# Altium PCB PES_BOARD_V2023.PcbDoc (part 1 of 3)
Units mm, origin at the board's own origin, x right, y up, seen from the top; angles counter-clockwise.
Board outline 110.62 x 70.82 mm, 2 copper layers (Top Layer, Bottom Layer), stack 0.325 mm thick; 197 components, 152 nets, 714 pads, 351 vias.
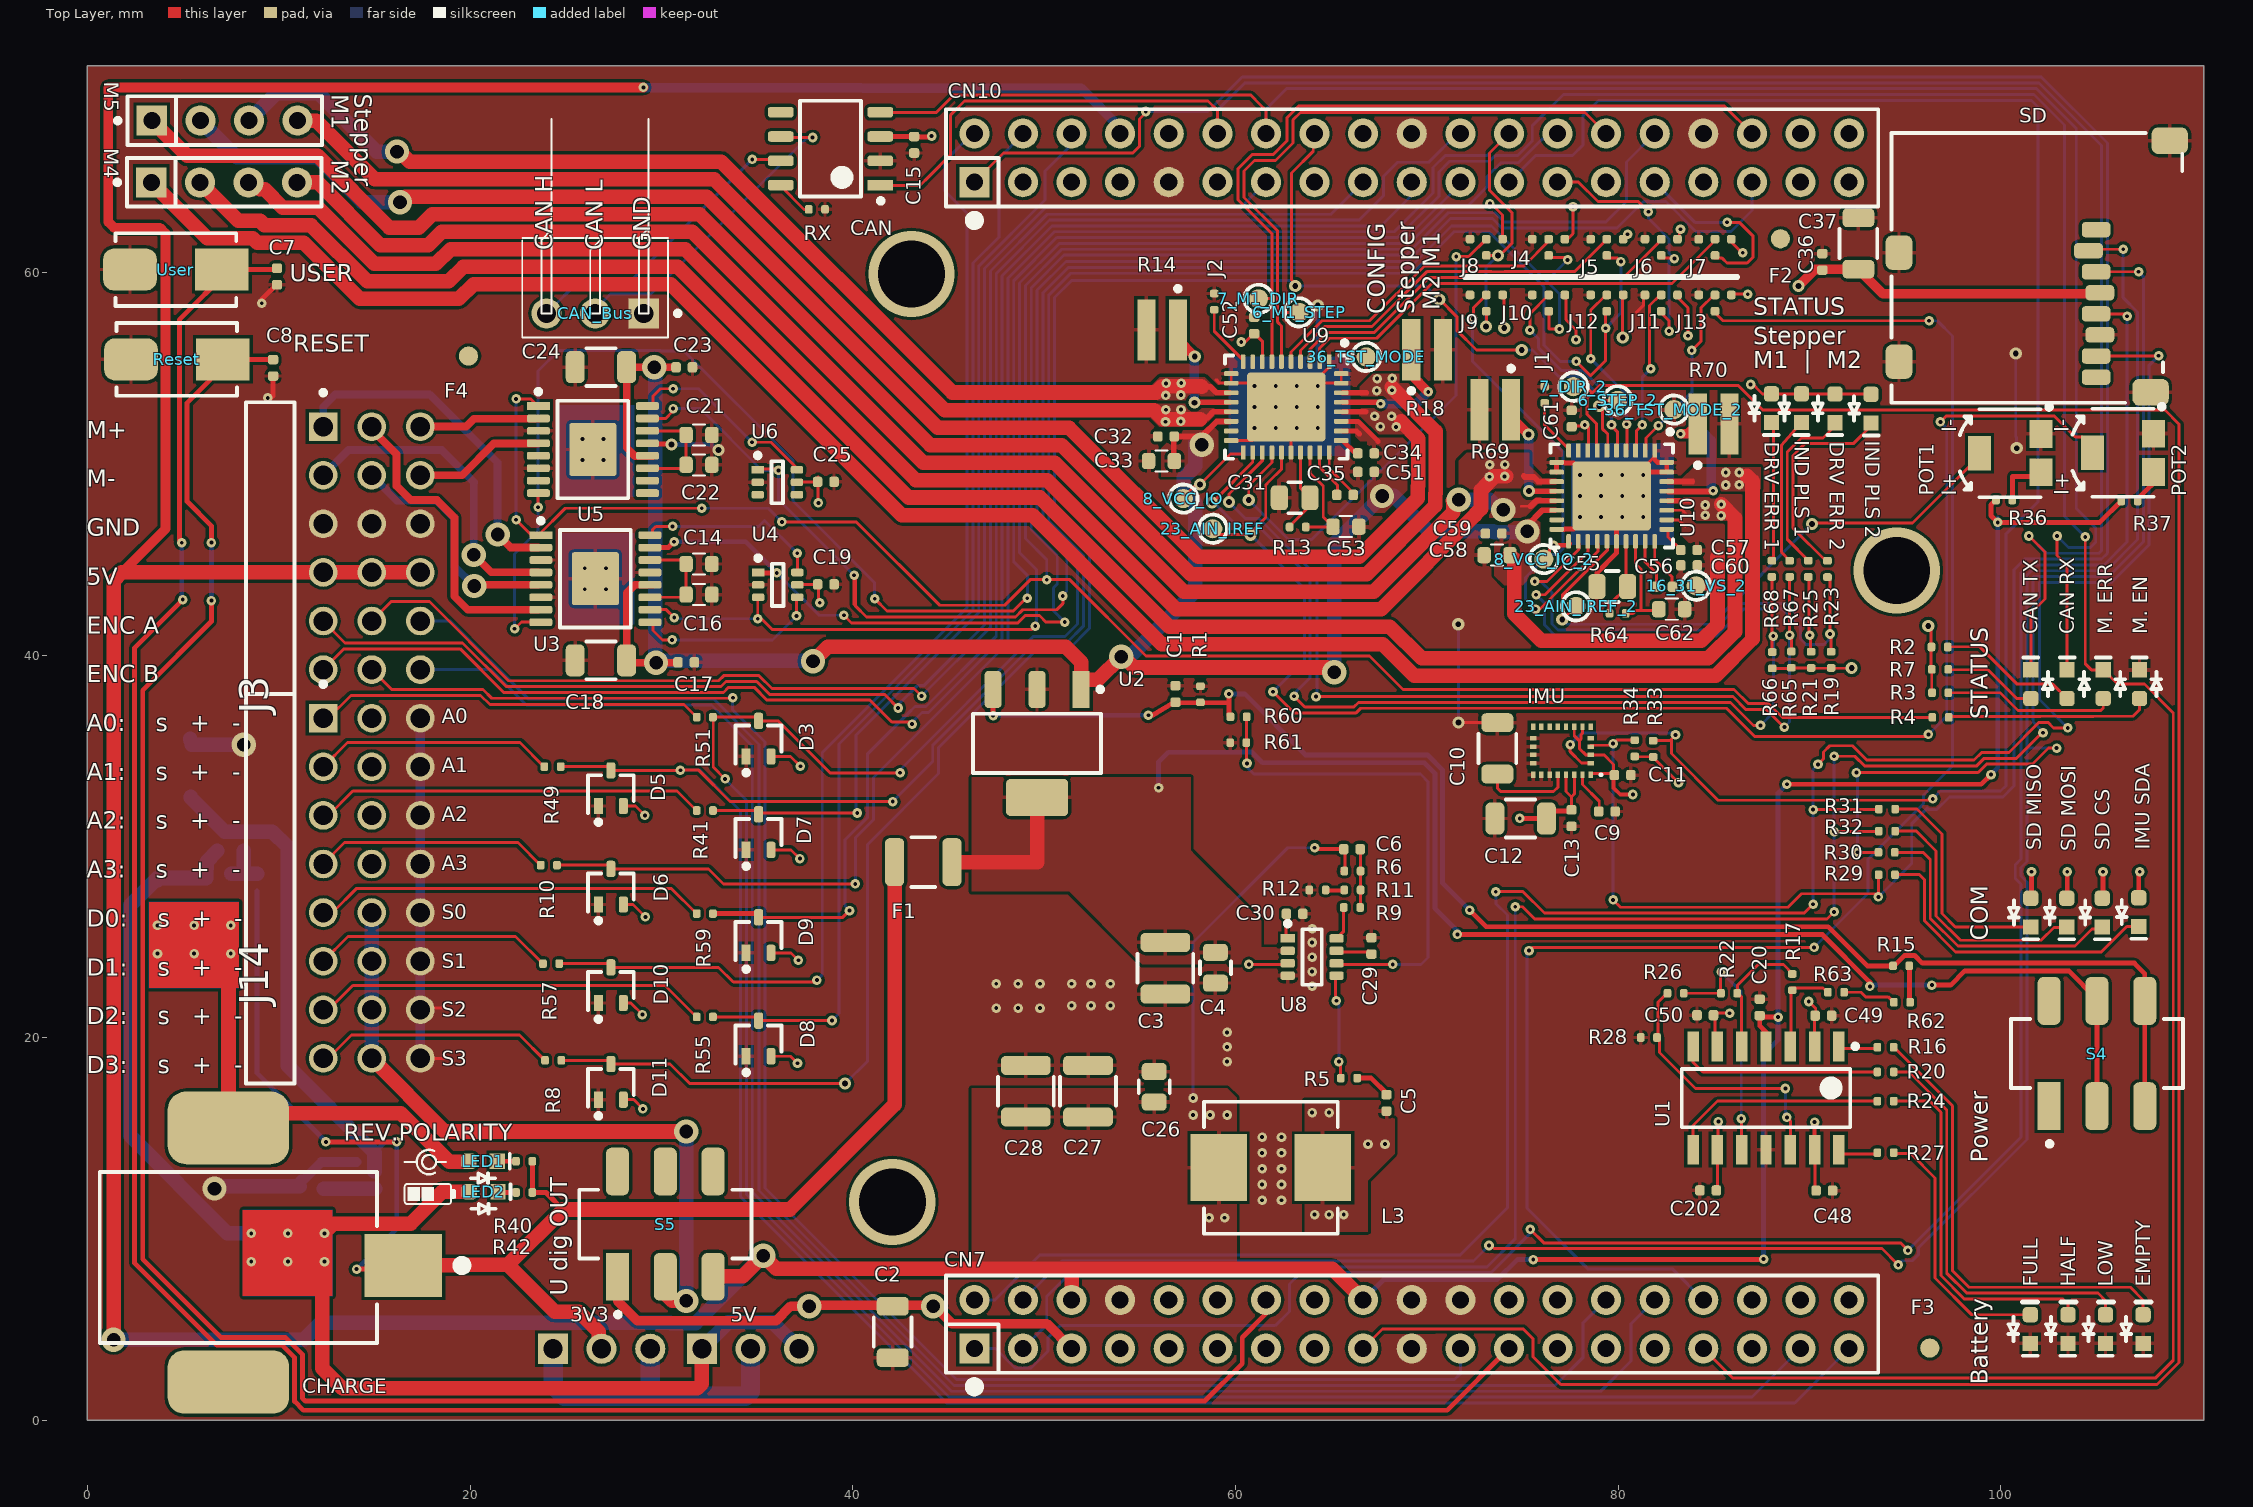
[diagram p0: Top Layer view]
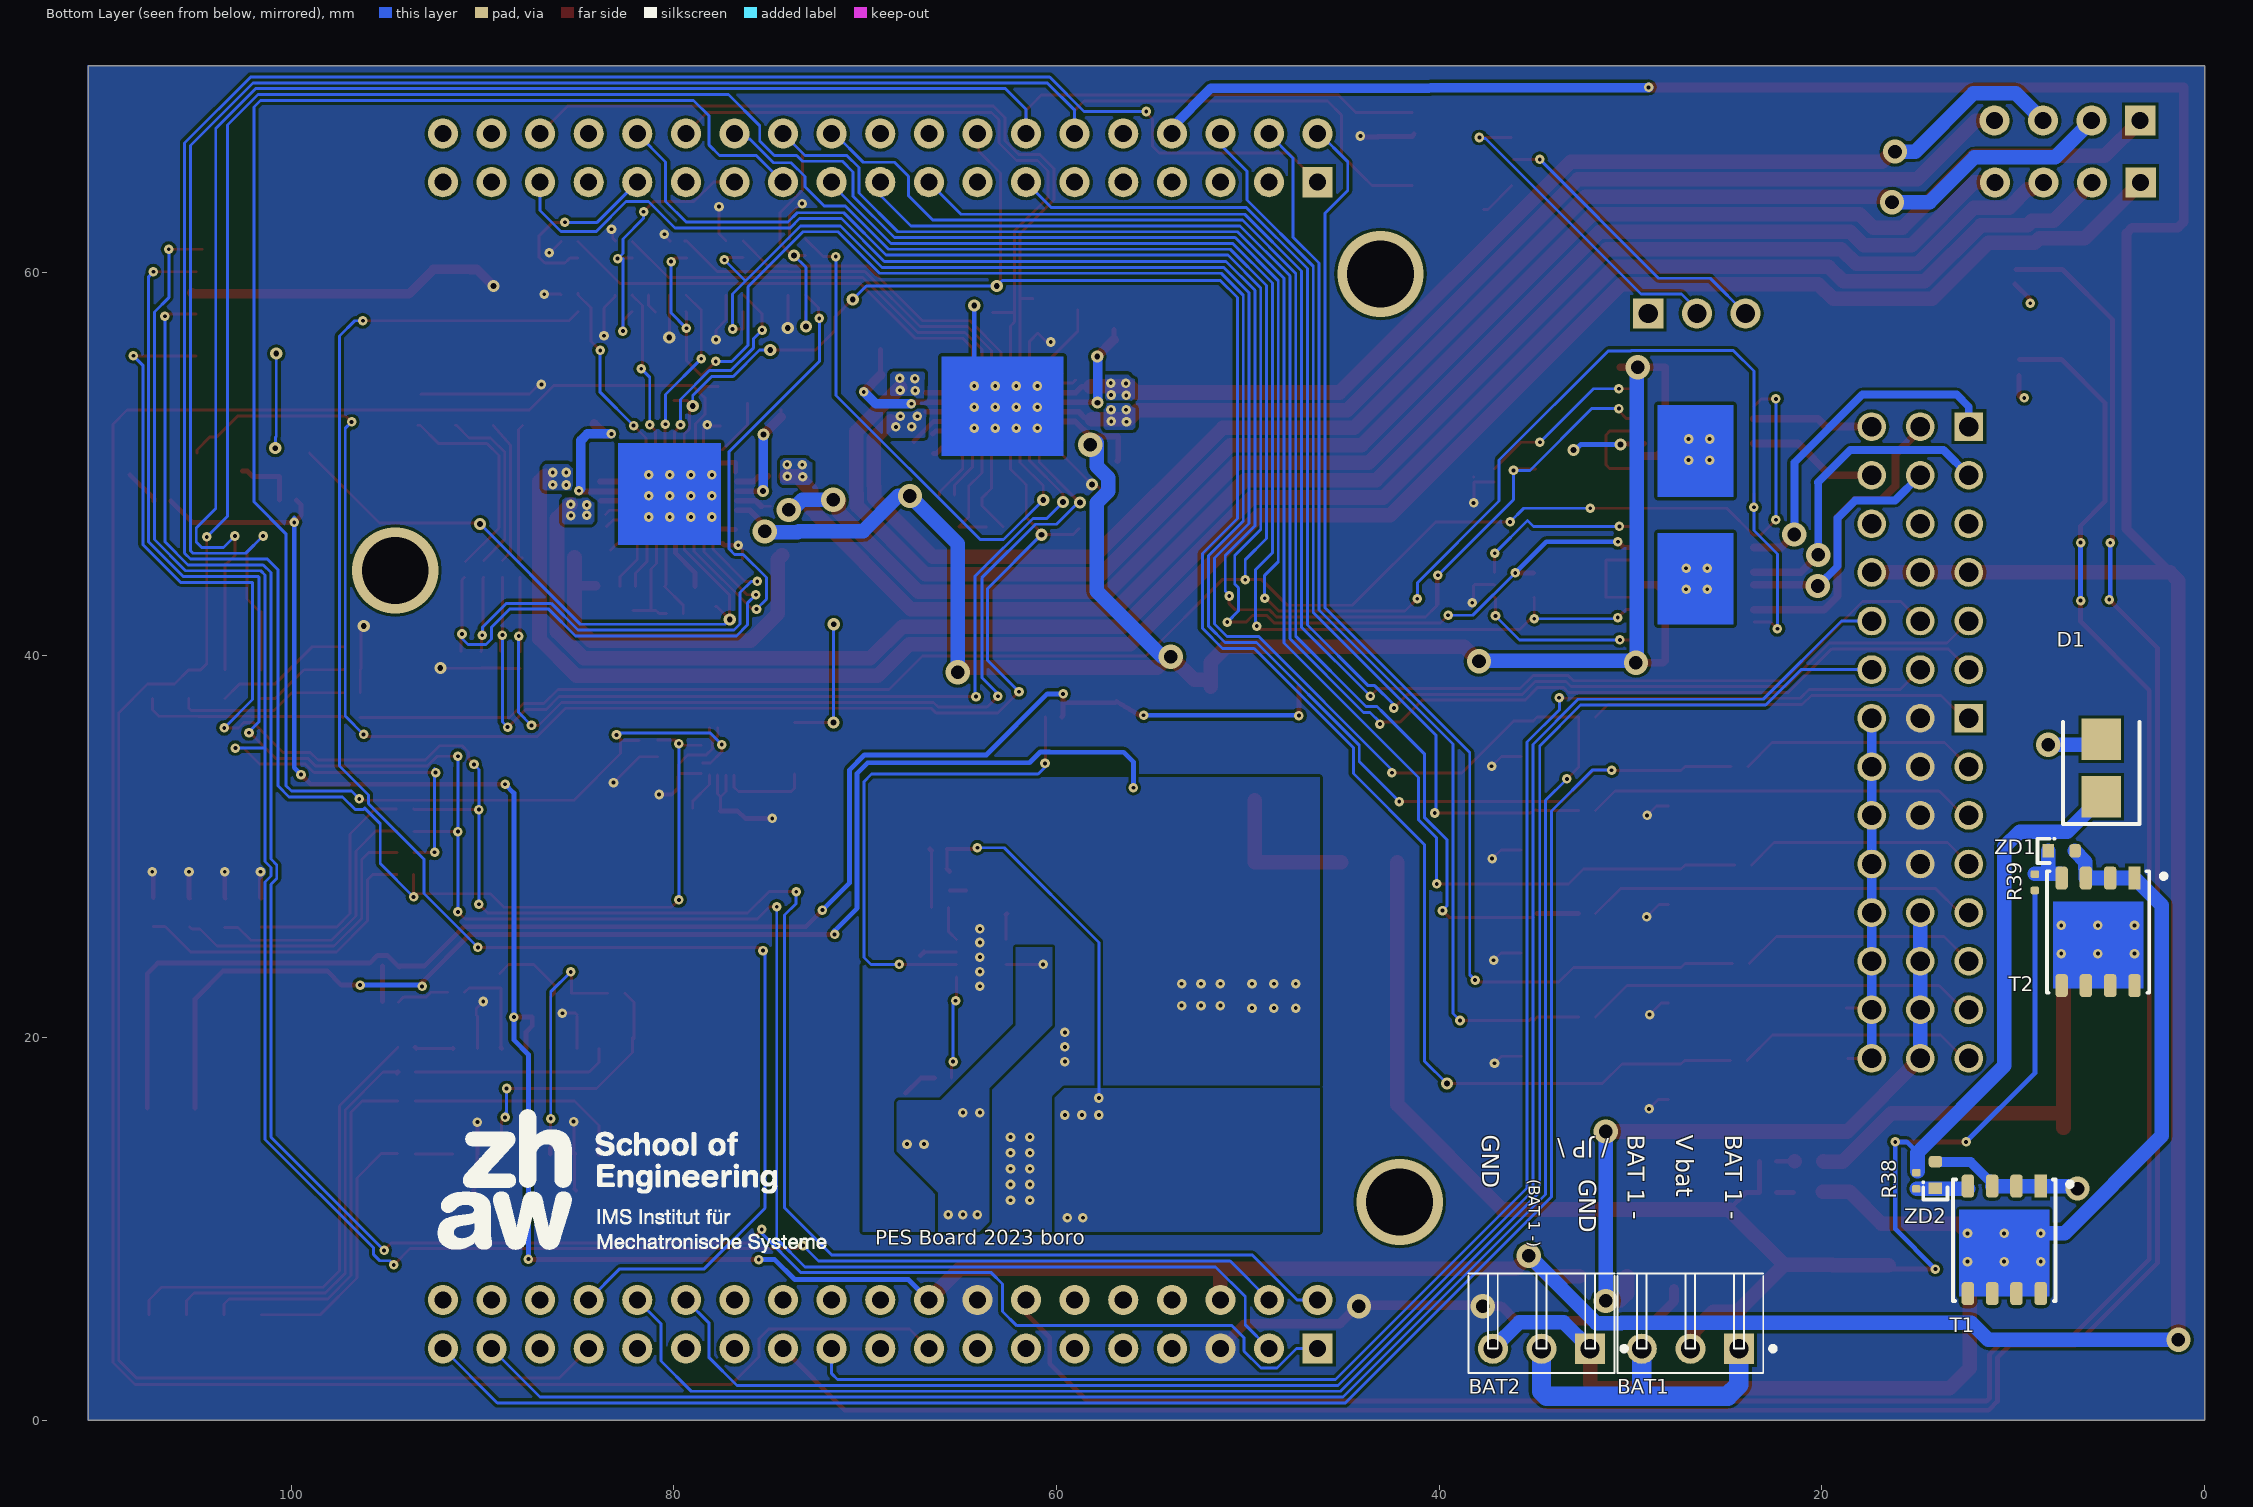
[diagram p1: Bottom Layer view, seen from below]
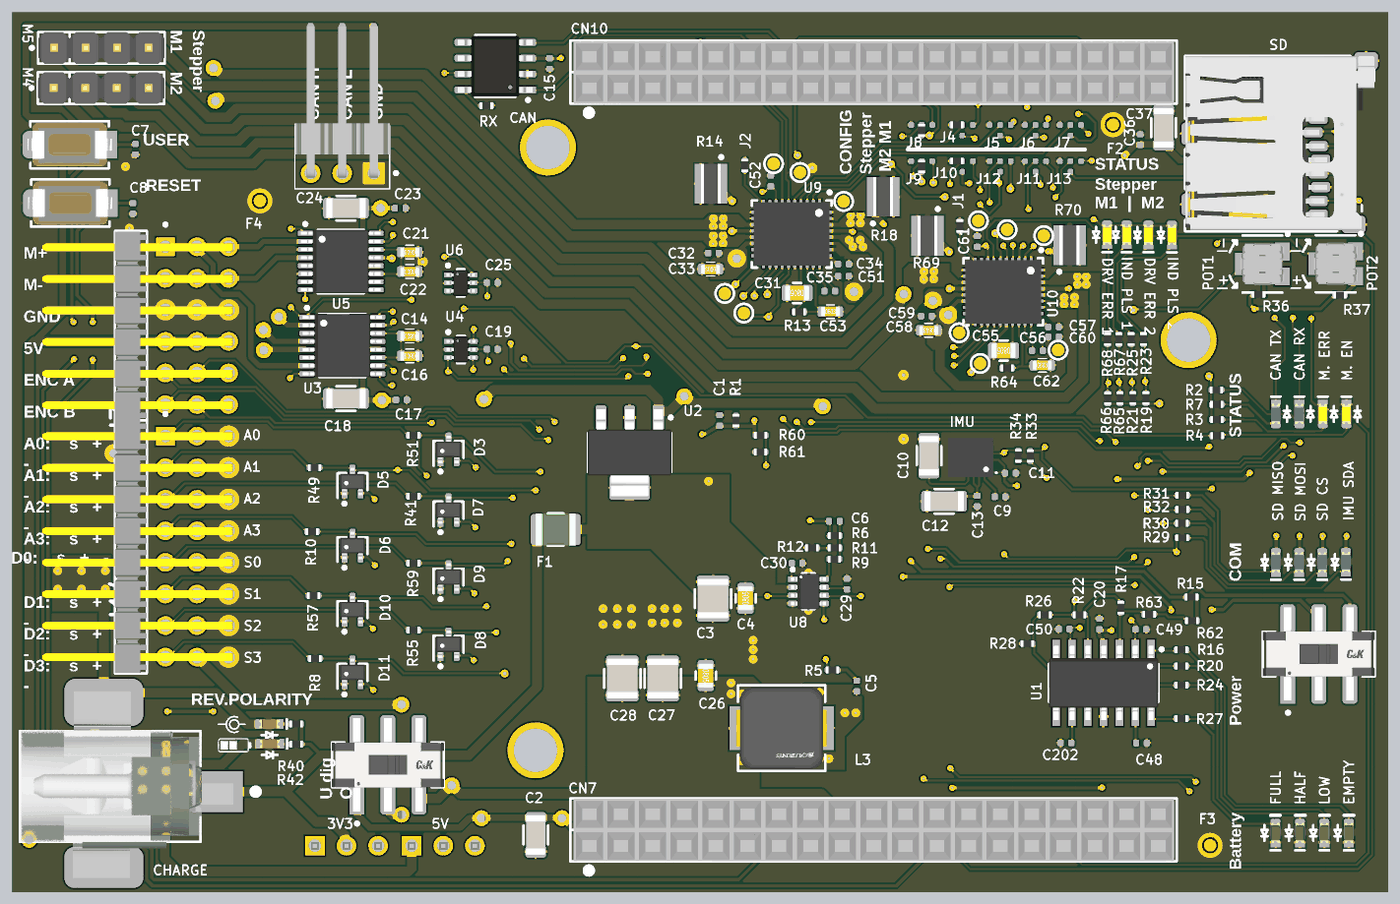
[diagram p4: 3D render of the assembled board from above, using the file's embedded part models]
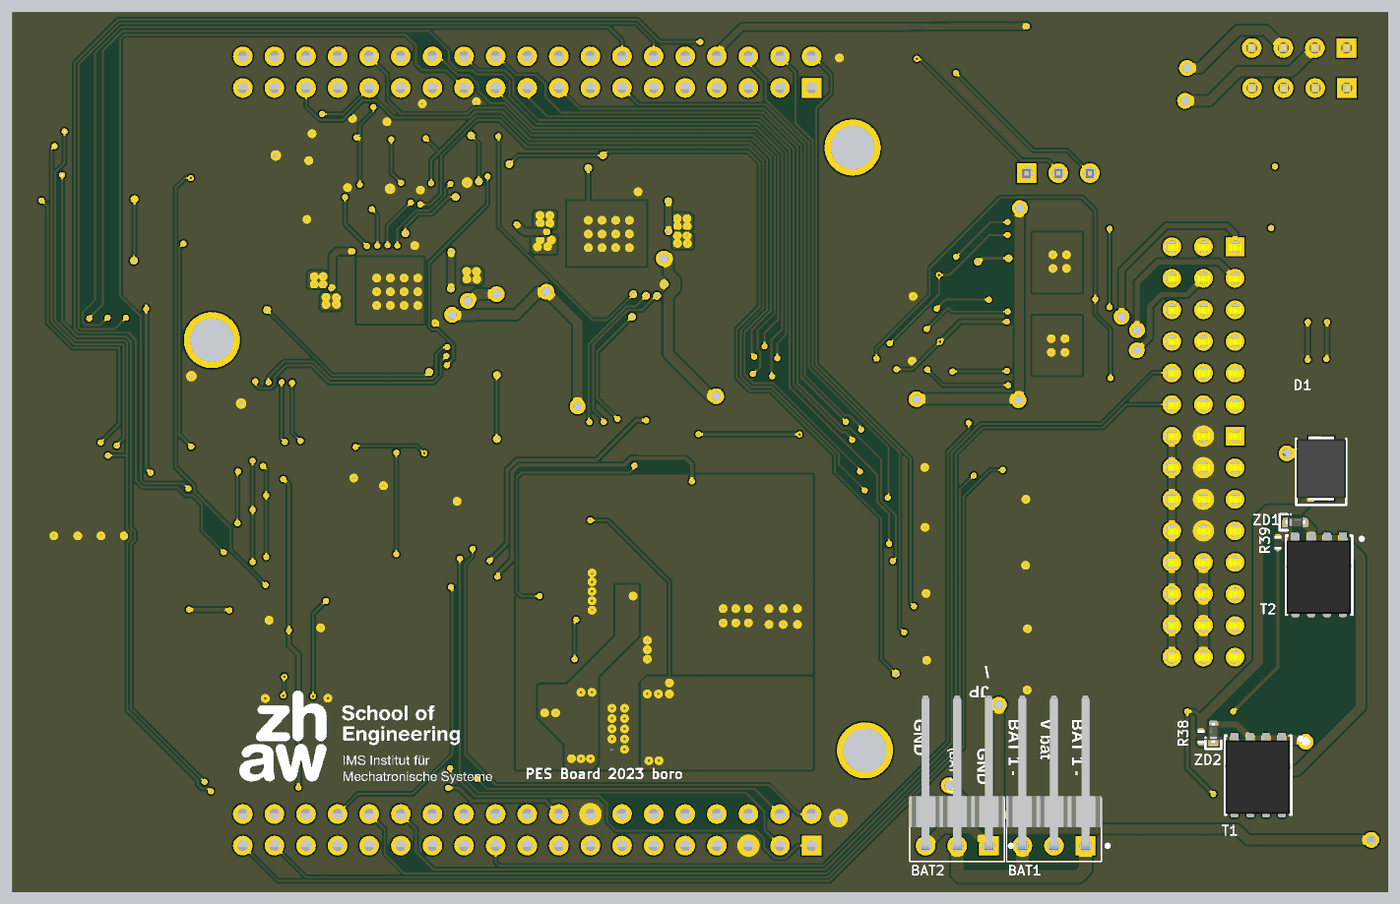
[diagram p5: 3D render of the assembled board from below, using the file's embedded part models]

## Layer stack, top to bottom
Top Solder: solder mask 0.0102, Solder Resist, Dk 3.5
Top Layer: signal copper 0.0356
Dielectric 1: core 0.254, FR-4, Dk 4.2
Bottom Layer: signal copper 0.0356
Bottom Solder: solder mask 0.0102, Solder Resist, Dk 3.5

## Board outline
0,0 110.617,0 110.617,70.815 0,70.815

## Design rules (kind name [scope] priority, off if disabled: settings)
Clearance [All] p1: gap=0.152 ignorepadtopadclearanceinfootprint=FALSE except(0: Arc-Hole Track-Hole SMDPad-Hole THPad-Hole Via-Hole Fill-Hole Poly-Hole Region-Hole Text-Hole)
ComponentClearance [All] p1 off: gap=0.254 collisioncheckmode=3 verticalgap=0.254 showdistances=FALSE
Height [All] p1 off: minheight=0 maxheight=25.4 prefheight=12.7
PlaneConnect [All] p1: planeconnectstyle=Direct reliefexpansion=0.508 reliefentries=4 reliefconductorwidth=0.254 reliefairgap=0.254
PolygonConnect [All] p1: thpad.connectstyle=Direct thpad.reliefconductorwidth=0.254 thpad.reliefentries=4 thpad.polygonreliefangle="90 Angle" thpad.airgapwidth=0.254 smdpad.connectstyle=Relief smdpad.reliefconductorwidth=0.203 smdpad.reliefentries=4 smdpad.polygonreliefangle="90 Angle" smdpad.airgapwidth=0.152 via.connectstyle=Direct via.reliefconductorwidth=0.254 via.reliefentries=4 via.polygonreliefangle="90 Angle" via.airgapwidth=0.254
RoutingVias [All] p1: holewidth=0.305 width=0.635 viastyle="Through Hole" minholewidth=0.305 minwidth=0.635 maxholewidth=564.439 maxwidth=141.097
SilkToSolderMaskClearance [IsPad] p1: minsilkscreentomaskgap=0.127 clearancetoexposedcopper=TRUE
SolderMaskExpansion [All] p1: expansion=0.102 istentingtop=FALSE
Width [All] p1: maxlimit=5.08 minlimit=0.152 preferedwidth=0.254
26 further rules are at their usual default settings.

## Classes and differential pairs
component class Memory: C36 C37 R30 R31 R32 SD "SD CS" "SD MISO" "SD MOSI"
component class StepperMotorDriver: 6_M1_STEP 6_STEP_2 7_DIR_2 7_M1_DIR 8_VCC_IO 8_VCC_IO_2 16_31_VS_2 23_AIN_IREF 23_AIN_IREF_2 36_TST_MODE 36_TST_MODE_2 C31 C32 C33 C34 C35 C51 C52 C53 C55 C56 C57 C58 C59 C60 C61 C62 Driver_error_2 "DRV ERR 1" "DRV ERR 2" drv_err Drv_err "IND PLS 1" "IND PLS 2" Ind_pls Index_pulse_2 J1 J2 J4 J5 J6 J7 J8 J9 J10 J11 J12 J13 M4 M5 POT1 POT2 R13 R14 R18 R19 R21 R23 R25 R36 R37 R64 R65 R66 R67 R68 R69 R70 U9 U10
component class AuxConnectors: CAN_Bus D3 D5 D6 D7 D8 D9 D10 D11 J14 R8 R10 R41 R49 R51 R55 R57 R59 S5
component class PES_BOARD_V2023: F2 F3 F4
component class Power: BAT1 BAT2 C1 C2 C3 C4 C5 C6 C26 C27 C28 C29 C30 CHARGE Chargerev_polarity D1 F1 L3 L? LED1 LED2 R1 R5 R6 R9 R11 R12 R38 R39 R40 R42 R60 R61 S4 T1 T2 U2 U8 ZD1 ZD2
component class UC: * *2 *3 *5 C7 C8 CN7 CN10 Reset User
component class Motordriver: C14 C16 C17 C18 C19 C21 C22 C23 C24 C25 J3 "M. EN" "M. ERR" M.ERr R3 R4 U3 U4 U5 U6
component class Communication: C15 CAN "CAN RX" "CAN TX" R2 R7 RX
component class DigitalSensors: C9 C10 C11 C12 C13 IMU "IMU CS_AG" "IMU CS_M" "IMU SDA" R29 R33 R34
component class Indicators: 30 C20 C48 C49 C50 C202 EMPTY FUEL FULL HALF LOW R15 R16 R17 R20 R22 R24 R26 R27 R28 R62 R63 U1

## Components (designator, comment, footprint, x,y, rotation, side; value= is the part's Value field where it differs from the comment)
6_M1_STEP "Test Pad" TP10R 63.325,57.915 r90 top
6_STEP_2 "Test Pad" TP10R 79.975,53.315 r90 top
7_DIR_2 "Test Pad" TP10R 77.665,54.03 r90 top
7_M1_DIR "Test Pad" TP10R 61.205,58.622 r90 top
8_VCC_IO "Test Pad" TP10R 57.279,48.185 r90 top
8_VCC_IO_2 "Test Pad" TP10R 76.12,45.02 r90 top
16_31_VS_2 "Test Pad" TP10R 84.075,43.625 r90 top
23_AIN_IREF "Test Pad" TP10R 58.816,46.605 r90 top
23_AIN_IREF_2 "Test Pad" TP10R 77.805,42.551 r90 top
36_TST_MODE "Test Pad" TP10R 66.835,55.585 r90 top
36_TST_MODE_2 "Test Pad" TP10R 82.919,52.835 r90 top
BAT1 "PRPC003SGAN-M71RC" HD254_1x3_MH 24.335,3.749 r90 bottom
BAT2 "PRPC003SGAN-M71RC" HD254_1x3_MH 32.115,3.749 r90 bottom
C1 "100nF/50V" CAPC1005X05L 56.865,37.971 r270 top value=100nF
C2 "10uF/50V" CAPC3216X12L 42.088,4.623 r90 top value=10µF
C3 "47uF/16V" CAPC3225X25L 56.337,23.635 r90 top value=47µF
C4 "4.7uF/50V" CAPC2012X15L 58.953,23.66 r90 top value=4.7µF
C5 "100nF/50V" CAPC1005X05L 67.894,16.599 r90 top value=100nF
C6 "15pF/50V" CAPC1005X05L 66.091,29.858 r180 top value=15pF
C7 "100nF/50V" CAPC1005X05L 9.906,59.792 r90 top value=100nF
C8 "100nF/50V" CAPC1005X05L 9.703,55.016 r90 top value=100nF
C9 "100nF/50V" CAPC1005X05L 79.416,31.829 r0 top value=100nF
C10 "10uF/50V" CAPC3216X12L 73.691,35.129 r270 top value=10µF
C11 "100nF/50V" CAPC1005X05L 80.239,33.731 r0 top value=100nF
C12 "10uF/50V" CAPC3216X12L 74.909,31.463 r0 top value=10µF
C13 "100nF/50V" CAPC1005X05L 77.566,31.479 r270 top value=100nF
C14 "1uF/50V" CAPC1608X09L 31.962,44.764 r180 top value=1µF
C15 "100nF/50V" CAPC1005X05L 43.205,66.675 r90 top value=100nF
C16 "1uF/50V" CAPC1608X09L 31.962,43.163 r180 top value=1µF
C17 "100nF/50V" CAPC1005X05L 31.293,39.624 r180 top value=100nF
C18 "10uF/50V" CAPC3216X12L 26.831,39.726 r180 top value=10µF
C19 "100nF/50V" CAPC1005X05L 38.591,43.697 r0 top value=100nF
C20 "100nF/50V" CAPC1005X05L 87.401,21.59 r90 top value=100nF
C21 "1uF/50V" CAPC1608X09L 31.962,51.511 r180 top value=1µF
C22 "1uF/50V" CAPC1608X09L 31.962,49.945 r180 top value=1µF
C23 "100nF/50V" CAPC1005X05L 31.191,55.042 r180 top value=100nF
C24 "10uF/50V" CAPC3216X12L 26.831,55.051 r180 top value=10µF
C25 "100nF/50V" CAPC1005X05L 38.591,49.056 r0 top value=100nF
C26 "4.7uF/50V" CAPC2012X15L 55.753,17.437 r270 top value=4.7µF
C27 "47uF/16V" CAPC3225X25L 52.299,17.208 r270 top value=47µF
C28 "47uF/16V" CAPC3225X25L 49.047,17.208 r270 top value=47µF
C29 "100nF/50V" CAPC1005X05L 67.107,24.803 r270 top value=100nF
C30 "22nF/50V" CAPC1005X05L 63.094,26.479 r180 top value=22nF
C31 "4.7uF/50V" CAPC2012X15L 63.095,48.225 r180 top value=4.7µF
C32 "100nF/50V" CAPC1005X05L 56.375,51.431 r180 top value=100nF
C33 "1uF/50V" CAPC1608X09L 56.135,50.145 r180 top value=1µF
C34 "100nF/50V" CAPC1005X05L 66.825,50.545 r0 top value=100nF
C35 "22nF/50V" CAPC1005X05L 65.725,48.375 r180 top value=22nF
C36 "100nF/50V" CAPC1005X05L 90.675,60.555 r90 top value=100nF
C37 "10uF/50V" CAPC3216X12L 92.561,61.515 r90 top value=10µF
C48 "100nF/50V" CAPC1005X05L 90.78,12.014 r0 top value=100nF
C49 "100nF/50V" CAPC1005X05L 90.729,21.158 r0 top value=100nF
C50 "100nF/50V" CAPC1005X05L 84.557,21.184 r180 top value=100nF
C51 "100nF/50V" CAPC1005X05L 66.825,49.577 r180 top value=100nF
C52 "100nF/50V" CAPC1005X05L 60.98,57.235 r90 top value=100nF
C53 "1uF/50V" CAPC1608X09L 65.775,46.715 r0 top value=1µF
C55 "4.7uF/50V" CAPC2012X15L 79.695,43.585 r180 top value=4.7µF
C56 "22nF/50V" CAPC1005X05L 82.415,43.579 r180 top value=22nF
C57 "100nF/50V" CAPC1005X05L 83.705,45.491 r0 top value=100nF
C58 "100nF/50V" CAPC1005X05L 73.496,46.355 r180 top value=100nF
C59 "1uF/50V" CAPC1608X09L 73.675,45.225 r180 top value=1µF
C60 "100nF/50V" CAPC1005X05L 83.715,44.695 r180 top value=100nF
C61 "100nF/50V" CAPC1005X05L 77.574,52.366 r90 top value=100nF
C62 "1uF/50V" CAPC1608X09L 82.805,42.4 r0 top value=1µF
C202 "100nF/50V" CAPC1005X05L 84.709,12.023 r180 top value=100nF
CAN "SN65HVD231" SOIC127P600X175-8L 38.837,66.472 r90 top
"CAN RX" "LTST-C190TBKT" LEDSC160X80X80-2Lbl 103.467,38.481 r270 top
"CAN TX" "LTST-C190TBKT" LEDSC160X80X80-2Lbl 101.575,38.481 r270 top
CAN_Bus "PRPC003SGAN-M71RC" HD254_1x3_MH 29.074,57.861 r90 top
CHARGE "RASM722X" SWITCHCRAFT_RASM722X 11.94,8.648 r180 top
CN7 "ST Nucleo 446RE-CN7" HD254_2x19_FV_THT 46.355,3.759 r0 top
CN10 "ST Nucleo 446RE-CN10" HD254_2x19_FV_THT 46.355,64.719 r0 top
D1 "D-TVS-AA-2" DIOM4436X26L 5.4,34.1 r90 bottom
D3 "BAS40-04W" SOT65P220X110-3L 35.077,35.636 r0 top
D5 "BAS40-04W" SOT65P220X110-3L 27.356,33.045 r0 top
D6 "BAS40-04W" SOT65P220X110-3L 27.356,27.898 r0 top
D7 "BAS40-04W" SOT65P220X110-3L 35.077,30.752 r0 top
D8 "BAS40-04W" SOT65P220X110-3L 35.077,19.964 r0 top
D9 "BAS40-04W" SOT65P220X110-3L 35.077,25.367 r0 top
D10 "BAS40-04W" SOT65P220X110-3L 27.356,22.75 r0 top
D11 "BAS40-04W" SOT65P220X110-3L 27.356,17.696 r0 top
"DRV ERR 1" "LTST-C190KSKT" LEDSC160X80X80-2Lye 88.015,52.905 r90 top
"DRV ERR 2" "LTST-C190KSKT" LEDSC160X80X80-2Lye 91.335,52.895 r90 top
EMPTY "LTST-C190KGKT" LEDSC160X80X80-2Lgn 107.442,4.775 r90 top
F1 "1210L050YR" FUSER_1210LXXX_H85 43.688,29.185 r0 top
F2 "Fiducial 1.0mm" FID1X2R 88.485,61.762 r90 top
F3 "Fiducial 1.0mm" FID1X2R 96.291,3.785 r90 top
F4 "Fiducial 1.0mm" FID1X2R 19.914,55.629 r90 top
FULL "LTST-C190KGKT" LEDSC160X80X80-2Lgn 101.549,4.775 r90 top
HALF "LTST-C190KGKT" LEDSC160X80X80-2Lgn 103.513,4.775 r90 top
IMU "LSM9DS1TR" LGA24C43P8X6_350X300X103 77.064,35.001 r90 top
"IMU SDA" "LTST-C190TBKT" LEDSC160X80X80-2Lbl 107.213,26.568 r90 top
"IND PLS 1" "LTST-C190KSKT" LEDSC160X80X80-2Lye 89.585,52.905 r90 top
"IND PLS 2" "LTST-C190KSKT" LEDSC160X80X80-2Lye 93.224,52.883 r90 top
J1 "0R" RESC1005X04L 76.165,53.606 r270 top value=0
J2 "0R" RESC1005X04L 58.895,58.475 r270 top value=0
J3 "TSW-106-08-F-T-RA" SAMTEC_TSW-106-08-F-T-RA 12.319,51.943 r270 top
J4 "Solder Jumper, 0402, 3 Positions" "Solder Jumper 3 Positions, Position 1" 75.944,61.74 r0 top
J5 "Solder Jumper 3 Position" "Solder Jumper, 0402, 3 Positions, DNP" 79.416,61.315 r0 top
J6 "Solder Jumper 3 Position" "Solder Jumper, 0402, 3 Positions, DNP" 82.256,61.315 r0 top
J7 "Solder Jumper 3 Position" "Solder Jumper, 0402, 3 Positions, DNP" 85.067,61.315 r0 top
J8 "Solder Jumper 3 Position" "Solder Jumper 3 Positions, Position 2" 73.112,61.315 r0 top
J9 "Solder Jumper 3 Position" "Solder Jumper 3 Positions, Position 2" 73.112,58.4 r0 top
J10 "Solder Jumper, 0402, 3 Positions" "Solder Jumper 3 Positions, Position 1" 75.944,58.825 r0 top
J11 "Solder Jumper 3 Position" "Solder Jumper, 0402, 3 Positions, DNP" 82.256,58.4 r0 top
J12 "Solder Jumper 3 Position" "Solder Jumper, 0402, 3 Positions, DNP" 79.416,58.4 r0 top
J13 "Solder Jumper 3 Position" "Solder Jumper, 0402, 3 Positions, DNP" 85.067,58.4 r0 top
J14 "TSW-108-08-F-T-RA" HD254_8x3_MH 12.319,36.703 r270 top
L3 "SRP7050TA-5R6M" FP-SRP7050TA-MFG 61.849,13.208 r180 top
LED1 "LTST-C190KRKT" LEDSC160X80X80-2Lrd 20.675,13.545 r180 top
LED2 "LTST-C190KRKT" LEDSC160X80X80-2Lrd 20.705,11.95 r180 top
LOW "LTST-C190KGKT" LEDSC160X80X80-2Lgn 105.478,4.775 r90 top
M4 "77311-118-04LF" HD254_1X4_MV 3.336,64.711 r0 top
M5 "77311-118-04LF" HD254_1X4_MV 3.361,67.936 r0 top
"M. EN" "LTST-C190KSKT" LEDSC160X80X80-2Lye 107.251,38.481 r270 top
"M. ERR" "LTST-C190KSKT" LEDSC160X80X80-2Lye 105.359,38.481 r270 top
POT1 "ST32ETA203" ST-32-Trimm 100.495,50.555 r180 top value=20k
POT2 "ST32ETA203" ST-32-Trimm 106.385,50.575 r180 top value=20k
R1 "10kR" RESC1005X04L 58.172,37.953 r270 top value=10k
R2 "1kR" RESC1005X04L 96.805,40.425 r180 top value=1k
R3 "330R" RESC1005X04L 96.835,38.035 r0 top value=330
R4 "1kR" RESC1005X04L 96.854,36.745 r0 top value=1k
R5 "10R" RESC1005X04L 65.938,17.894 r0 top value=10
R6 "47kR" RESC1005X04L 66.116,28.715 r180 top value=47k
R7 "1kR" RESC1005X04L 96.825,39.255 r180 top value=1k
R8 "10kR" RESC1005X04L 24.341,18.821 r180 top value=10k
R9 "33kR" RESC1005X04L 66.091,26.81 r0 top value=33k
R10 "10kR" RESC1005X04L 24.113,29.023 r180 top value=10k
R11 "5.6kR" RESC1005X04L 66.116,27.724 r0 top value=5.6k
R12 "3.3kR" RESC1005X04L 64.287,27.724 r0 top value=3.3k
R13 "2.2R" RESC1005X04L 63.255,46.695 r0 top value=2.2
R14 "120mR" RESC1632X06 56.17,57 r180 top value=0.12
R15 "10kR" RESC1005X04L 94.794,23.76 r180 top value=10k
R16 "1kR" RESC1005X04L 93.98,19.507 r0 top value=1k
R17 "1kR" RESC1005X04L 89.103,22.911 r90 top value=1k
R18 "120mR" RESC1632X06 70.019,55.962 r0 top value=0.12
R19 "47kR" RESC1005X04L 91.135,39.755 r90 top value=47k
R20 "1kR" RESC1005X04L 93.98,18.212 r0 top value=1k
R21 "47kR" RESC1005X04L 90.088,39.755 r90 top value=47k
R22 "1kR" RESC1005X04L 85.801,22.327 r180 top value=1k
R23 "1kR" RESC1005X04L 90.945,44.505 r270 top value=1k
R24 "1kR" RESC1005X04L 93.98,16.688 r0 top value=1k
R25 "1kR" RESC1005X04L 89.941,44.512 r270 top value=1k
R26 "1kR" RESC1005X04L 83.007,22.327 r180 top value=1k
R27 "1kR" RESC1005X04L 93.98,13.995 r0 top value=1k
R28 "10kR" RESC1005X04L 81.61,20.015 r180 top value=10k
R29 "1kR" RESC1005X04L 94.046,28.524 r180 top value=1k
R30 "1kR" RESC1005X04L 94.035,29.693 r180 top value=1k
R31 "1kR" RESC1005X04L 94.056,31.953 r180 top value=1k
R32 "1kR" RESC1005X04L 94.056,30.802 r180 top value=1k
R33 "1kR" RESC1005X04L 81.831,35.103 r90 top value=1k
R34 "1kR" RESC1005X04L 80.869,35.129 r90 top value=1k
R36 "21kR" RESC1005X04L 100.178,48.108 r0 top value=21k
R37 "21kR" RESC1005X04L 106.731,48.057 r0 top value=21k
R38 "100kR" RESC1005X04L 15.062,12.525 r270 bottom value=100k
R39 "100kR" RESC1005X04L 8.868,28.125 r90 bottom value=100k
R40 "4.7kR" RESC1005X04L 22.825,13.545 r180 top value=4.7k
R41 "10kR" RESC1005X04L 32.266,31.877 r180 top value=10k
R42 "4.7kR" RESC1005X04L 22.825,11.915 r180 top value=4.7k
R49 "10kR" RESC1005X04L 24.308,34.17 r180 top value=10k
R51 "10kR" RESC1005X04L 32.266,36.761 r180 top value=10k
R55 "10kR" RESC1005X04L 32.266,21.089 r180 top value=10k
R57 "10kR" RESC1005X04L 24.232,23.875 r180 top value=10k
R59 "10kR" RESC1005X04L 32.266,26.492 r180 top value=10k
R60 "100kR" RESC1005X04L 60.164,36.774 r0 top value=100k
R61 "47kR" RESC1005X04L 60.147,35.428 r0 top value=47k
R62 "10kR" RESC1005X04L 94.841,21.855 r0 top value=10k
R63 "6.8kR" RESC1005X04L 91.389,22.377 r0 top value=6.8k
R64 "2.2R" RESC1005X04L 79.978,42.185 r0 top value=2.2
R65 "47kR" RESC1005X04L 89.055,39.765 r90 top value=47k
R66 "47kR" RESC1005X04L 88.055,39.735 r90 top value=47k
R67 "1kR" RESC1005X04L 88.965,44.512 r270 top value=1k
R68 "1kR" RESC1005X04L 88.041,44.512 r270 top value=1k
R69 "120mR" RESC1632X06 73.58,52.83 r180 top value=0.12
R70 "120mR" RESC1632X06 84.992,52.079 r0 top value=0.12
Reset "147873-1" TE_147873-1 4.674,55.455 r180 top
RX "10kR" RESC1005X04L 38.125,63.298 r180 top value=10k
S4 "JS202011SCQN" SW_JS202011SCQN 105.029,19.177 r0 top
S5 "JS202011SCQN" SW_JS202011SCQN 30.2,10.26 r0 top
SD "693071010811" WUERTH_693071010811 101.16,58.189 r270 top
"SD CS" "LTST-C190TBKT" LEDSC160X80X80-2Lbl 105.308,26.543 r90 top
"SD MISO" "LTST-C190TBKT" LEDSC160X80X80-2Lbl 101.575,26.543 r90 top
"SD MOSI" "LTST-C190TBKT" LEDSC160X80X80-2Lbl 103.454,26.543 r90 top
T1 "SIRA64DP" SON127P615X515X110-8N 10.465,9.425 r0 bottom
T2 "SIRA64DP" SON127P615X515X110-8N 5.565,25.525 r0 bottom
U1 "TI-LMV324-D-14" D0014A_V 87.732,16.848 r270 top
U2 "BTS4142N" SOT230P700X180-4L 49.632,35.382 r180 top
U3 "DRV8848PWPR" TSOP65P640X120-17T277X246L 26.545,43.995 r270 top
U4 "TI-SN74AUP2GXX-6" SOT65P210X110-6L 36.077,43.671 r270 top
U5 "DRV8848PWPR" TSOP65P640X120-17T277X246L 26.415,50.745 r270 top
U6 "TI-SN74AUP2GXX-6" SOT65P210X110-6L 36.055,49.035 r270 top
U8 "MP1496S" TSOP65P280X100-8L 64.008,24.219 r270 top
U9 "TMC2130-LA" QFN50P500X600X80-37T360X410L 62.655,52.965 r180 top
U10 "TMC2130-LA" QFN50P500X600X80-37T360X410L 79.666,48.32 r180 top
User "147873-1" TE_147873-1 4.623,60.154 r180 top
ZD1 "SZMM5Z13VT1G" SODFL160X70-2L 7.465,29.77 r180 bottom
ZD2 "SZMM5Z13VT1G" SODFL160X70-2L 14.065,12.825 r90 bottom

## Footprints (in the part's own frame and the unit in brackets; to place one, negate y for a bottom-side part, rotate by r counter-clockwise, add the part's x,y. Pads: shape width x height; smd on the part's side, far side on the other; paste and mask are expansions set on the pad)
CAPC1005X05L [mm] "Chip Capacitor, 2-Leads, Body 1.00x0.50mm, IPC High Density"
  rrect50% 0.5x0.54 smd mask+0.05: 1(-0.43,0) 2(0.43,0)
  body extent -0.5,-0.25 0.5,0.25, height 0.5
CAPC1608X09L [mm] "Chip Capacitor, 2-Leads, Body 1.60x0.80mm, IPC High Density"
  rrect50% 0.7x0.85 smd mask+0.05: 1(-0.675,0) 2(0.675,0)
  silkscreen extent -0.33,-0.55 0.33,0.55, body extent -0.8,-0.38 0.8,0.42, height 0.9
CAPC2012X15L [mm] "Chip Capacitor 0805, 2-Leads, Body 2.00x1.25mm, IPC High Density"
  rrect50% 0.9x1.3 smd mask+0.05: 1(-0.8,0) 2(0.8,0)
  silkscreen extent -0.33,-0.81 0.33,0.81, body extent -1,-0.63 1,0.63, height 0.7
CAPC3216X12L [mm] "Chip Capacitor, 2-Leads, Body 3.20x1.6mm, IPC High Density"
  rrect50% 0.98x1.67 smd mask+0.05: 1(-1.345,0) 2(1.345,0)
  silkscreen extent -0.76,-0.99 0.76,0.99, body extent -1.6,-0.8 1.6,0.8, height 1.2
CAPC3225X25L [mm] "Chip Capacitor 1210, 2-Leads, Body 3.20x2.5mm, IPC High Density"
  rrect50% 1x2.6 smd mask+0.05: 1(-1.35,0) 2(1.35,0)
  silkscreen extent -0.75,-1.46 0.75,1.46, body extent -1.6,-1.25 1.6,1.25, height 2.5
D0014A_V [mm] "SOIC, 14-Leads, Body 8.75x4mm, Pitch 1.27mm"
  rect 1.55x0.6 smd: 1(-2.7,3.81) 2(-2.7,2.54) 3(-2.7,1.27) 4(-2.7,0) 5(-2.7,-1.27) 6(-2.7,-2.54) 7(-2.7,-3.81) 8(2.7,-3.81) 9(2.7,-2.54) 10(2.7,-1.27) 11(2.7,0) 12(2.7,1.27) 13(2.7,2.54) 14(2.7,3.81)
  silkscreen extent -2.82,-4.4 1.53,4.79, body extent -3,-4.4 3,4.4, height 1.75
DIOM4436X26L [mm] "Molded Diode, 2-Leads, Body 4.40x3.62mm, IPC High Density"
  rect 2.15x2.05 smd: 1(-1.5,0) 2(1.5,0)
  silkscreen extent -2.92,-2 2.4,2, body extent -2.6,-1.97 2.6,1.97, height 2.61
FID1X2R [mm] "Fiducial - Round 1x2mm"
  round 1 smd paste-0.5 mask+0.5: 1(0,0)
FP-SRP7050TA-MFG [mm] "SRP7050TA-5R6M"
  rect 2.95x3.5 smd mask+0.05: 1(-2.725,0) 2(2.725,0)
  silkscreen extent -3.5,-3.45 3.5,3.45, body extent -3.65,-3.3 3.65,3.3, height 5
FUSER_1210LXXX_H85 [mm] "SMD-2, 2-Leads, Body 3.43x2.80mm, Height 0.85mm, 1210"
  rrect50% 1x2.5 smd: 1(-1.5,0) 2(1.5,0)
  silkscreen extent -0.63,-1.3 0.63,1.3, body extent -1.61,-1.29 1.61,1.29, height 0.85
HD254_1x3_MH [mil] "Header 2.54mm 1x3 Male Horizontal"
  rect 62x62 hole 39.37: 1(0,0)
  round 62 hole 39.37: 2(0,100) 3(0,200)
  silkscreen extent -50,-75 155,250, body extent -13,-50 476,250, height 139
HD254_1X4_MV [mil] "Header 2.54mm 1x4 Male Vertical"
  rect 62x62 hole 35: 1(0,0)
  round 62 hole 35: 2(100,0) 3(200,0) 4(300,0)
  silkscreen extent -75,-50 350,50, body extent -50,-50 350,50, height 340
HD254_2x19_FV_THT [mil] "Socket 2.54mm 2x19 (6-534206-9)"
  rect 62x62 hole 35: 1(0,0)
  round 62 hole 35: 2(0,100) 3(100,0) 4(100,100) 5(200,0) 6(200,100) 7(300,0) 8(300,100) 9(400,0) 10(400,100) 11(500,0) 12(500,100) 13(600,0) 14(600,100) 15(700,0) 16(700,100) 17(800,0) 18(800,100) 19(900,0) 20(900,100) 21(1000,0) 22(1000,100) 23(1100,0) 24(1100,100) 25(1200,0) 26(1200,100) 27(1300,0) 28(1300,100) 29(1400,0) 30(1400,100) 31(1500,0) 32(1500,100) 33(1600,0) 34(1600,100) 35(1700,0) 36(1700,100) 37(1800,0) 38(1800,100)
  silkscreen extent -58,-89 1860,150, body extent -48,-50 1852,148, height 341
HD254_8x3_MH [mm] "Pitch 2.54mm, 8x3 male, horizontal"
  rect 1.5x1.5 hole 1.02: 1(0,0)
  round 1.5 hole 1.02: 2(0,2.54) 3(0,5.08) 4(2.54,0) 5(2.54,2.54) 6(2.54,5.08) 7(5.08,0) 8(5.08,2.54) 9(5.08,5.08) 10(7.62,0) 11(7.62,2.54) 12(7.62,5.08) 13(10.16,0) 14(10.16,2.54) 15(10.16,5.08) 16(12.7,0) 17(12.7,2.54) 18(12.7,5.08) 19(15.24,0) 20(15.24,2.54) 21(15.24,5.08) 22(17.78,0) 23(17.78,2.54) 24(17.78,5.08)
  silkscreen extent -1.9,-4.04 19.1,0.13, body extent -1.26,-9.9 19.06,5.4, height 8.36
LEDSC160X80X80-2Lbl [mm] "LED 0603, 2-Leads, Body 1.6x0.8x0.8mm, blue"
  rect 0.8x0.8 smd mask+0.05: 1(-0.75,0)
  rrect50% 0.8x0.8 smd mask+0.05: 2(0.75,0)
  silkscreen extent -1.4,-0.38 0.63,1.14, body extent -0.81,-0.4 0.81,0.4, height 0.6
LEDSC160X80X80-2Lgn [mm] "LED 0603, 2-Leads, Body 1.6x0.8x0.8mm, green"
  rect 0.8x0.8 smd mask+0.05: 1(-0.75,0)
  rrect50% 0.8x0.8 smd mask+0.05: 2(0.75,0)
  silkscreen extent -1.4,-0.38 0.63,1.14, body extent -0.81,-0.4 0.81,0.4, height 0.6
LEDSC160X80X80-2Lrd [mm] "LED 0603, 2-Leads, Body 1.6x0.8x0.8mm, red"
  rect 0.8x0.8 smd mask+0.05: 1(-0.75,0)
  rrect50% 0.8x0.8 smd mask+0.05: 2(0.75,0)
  silkscreen extent -1.4,-0.38 0.63,1.14, body extent -0.81,-0.4 0.81,0.4, height 0.6
LEDSC160X80X80-2Lye [mm] "LED 0603, 2-Leads, Body 1.6x0.8x0.8mm, yellow"
  rect 0.8x0.8 smd mask+0.05: 1(-0.75,0)
  rrect50% 0.8x0.8 smd mask+0.05: 2(0.75,0)
  silkscreen extent -1.4,-0.38 0.63,1.14, body extent -0.81,-0.4 0.81,0.4, height 0.6
LGA24C43P8X6_350X300X103 [mm] "LGA-24, 24-Leads, Body 3.50x3.00mmx1.03mm, Pitch 0.43mm"
  rect 0.35x0.23 smd mask+0.05: 1(-1.25,-1.505) 6(1.25,-1.505) 7(1.25,-1.075) 8(1.25,-0.645) 9(1.25,-0.215) 10(1.25,0.215) 11(1.25,0.645) 12(1.25,1.075) 13(1.25,1.505) 18(-1.25,1.505) 19(-1.25,1.075) 20(-1.25,0.645) 21(-1.25,0.215) 22(-1.25,-0.215) 23(-1.25,-0.645) 24(-1.25,-1.075)
  rect 0.23x0.35 smd mask+0.05: 2(-0.645,-1.505) 3(-0.215,-1.505) 4(0.215,-1.505) 5(0.645,-1.505) 14(0.645,1.505) 15(0.215,1.505) 16(-0.215,1.505) 17(-0.645,1.505)
  silkscreen extent -1.31,-2.11 -1.19,-1.98, body extent -1.58,-1.83 1.58,1.83, height 1.03
QFN50P500X600X80-37T360X410L [mm] "QFN-36, 36-Leads, Body 5.00x6.00mm, Pitch 0.50mm, Thermal Pad 3.60x4.10mm, IPC High Density"
  rect 0.25x0.75 smd: 1(-2.25,-2.375)
  rrect50% 0.25x0.75 smd: 2(-1.75,-2.375) 3(-1.25,-2.375) 4(-0.75,-2.375) 5(-0.25,-2.375) 6(0.25,-2.375) 7(0.75,-2.375) 8(1.25,-2.375) 9(1.75,-2.375) 10(2.25,-2.375) 19(2.25,2.375) 20(1.75,2.375) 21(1.25,2.375) 22(0.75,2.375) 23(0.25,2.375) 24(-0.25,2.375) 25(-0.75,2.375) 26(-1.25,2.375) 27(-1.75,2.375) 28(-2.25,2.375)
  rrect50% 0.75x0.25 smd: 11(2.875,-1.75) 12(2.875,-1.25) 13(2.875,-0.75) 14(2.875,-0.25) 15(2.875,0.25) 16(2.875,0.75) 17(2.875,1.25) 18(2.875,1.75) 29(-2.875,1.75) 30(-2.875,1.25) 31(-2.875,0.75) 32(-2.875,0.25) 33(-2.875,-0.25) 34(-2.875,-0.75) 35(-2.875,-1.25) 36(-2.875,-1.75)
  rrect10% 4.1x3.6 smd: 37(0,0)
  silkscreen extent -3.2,-3.47 3.2,2.7, body extent -3.05,-2.55 3.05,2.55, height 0.8
RESC1005X04L [mm] "Chip Resistor 0402, 2-Leads, Body 1.05x0.55mm, IPC High Density"
  rrect50% 0.4x0.45 smd mask+0.05: 1(-0.425,0) 2(0.425,0)
  body extent -0.53,-0.28 0.53,0.28, height 0.4
RESC1632X06 [mm] "Reverse 1206, Body 3.2x1.6mm, 0.6mm high"
  rect 0.95x3.2 smd mask+0.05: 1(-0.825,0) 2(0.825,0)
  silkscreen extent -0.95,-2.27 -0.7,-2.03, body extent -0.8,-1.6 0.8,1.6, height 0.65
SAMTEC_TSW-106-08-F-T-RA [mm]
  rect 1.5x1.5 hole 1.02: 1(0,0)
  round 1.5 hole 1.02: 2(0,2.54) 3(0,5.08) 4(2.54,0) 5(2.54,2.54) 6(2.54,5.08) 7(5.08,0) 8(5.08,2.54) 9(5.08,5.08) 10(7.62,0) 11(7.62,2.54) 12(7.62,5.08) 13(10.16,0) 14(10.16,2.54) 15(10.16,5.08) 16(12.7,0) 17(12.7,2.54) 18(12.7,5.08)
  silkscreen extent -1.9,-4.04 13.97,0.13, body extent -1.22,-9.9 14.02,5.4, height 8.21
SODFL160X70-2L [mm] "SODFL-2, 2-Leads, Body 0.80x1.60mm, IPC High Density"
  rect 0.6x0.7 smd mask+0.05: 1(-0.7,0)
  rrect50% 0.6x0.7 smd mask+0.05: 2(0.7,0)
  silkscreen extent -1.27,-0.63 -0.33,0.68, body extent -0.8,-0.4 0.8,0.4, height 0.65
SOIC127P600X175-8L [mm] "SOIC-8, 8-Leads, Body 4.90x3.90mm, Pitch 1.27mm, IPC High Density"
  rect 0.55x1.35 smd mask+0.05: 1(-1.905,-2.6)
  rrect50% 0.55x1.35 smd mask+0.05: 2(-0.635,-2.6) 3(0.635,-2.6) 4(1.905,-2.6) 5(1.905,2.6) 6(0.635,2.6) 7(-0.635,2.6) 8(-1.905,2.6)
  silkscreen extent -2.85,-2.75 2.5,1.6, body extent -2.45,-3 2.45,3, height 1.7
"Solder Jumper 3 Positions, Position 1" [mm] "Solder Jumber 3 Positions, Position 1"
  rrect50% 0.45x0.45 smd mask+0.05: 1(0.425,0) 2(-0.425,0) 3(0.425,-0.85) 4(1.275,0)
  body extent -0.53,-0.27 0.52,0.28, height 0.4
"Solder Jumper 3 Positions, Position 2" [mm] "Solder Jumper 3 Positions, Position 2"
  rrect50% 0.45x0.45 smd mask+0.05: 1(0,0.425) 2(-0.85,0.425) 3(0,-0.425) 4(0.85,0.425)
  body extent -0.28,-0.53 0.27,0.52, height 0.4
"Solder Jumper, 0402, 3 Positions, DNP" [mm] "Solder Jumper, 0402, 3 Positions, DNP"
  rrect50% 0.45x0.45 smd mask+0.05: 1(0,0.425) 2(-0.85,0.425) 3(0,-0.425) 4(0.85,0.425)
SON127P615X515X110-8N [mm] "Transistor 5x6mm (PowerSO8, TDSON-8, PowerPAK SO-8, 8-PowerTDFN, DFN8, Power 56)"
  rect 0.65x1.2 smd mask+0.05: 1(-1.905,-2.825)
  rrect50% 0.65x1.2 smd mask+0.05: 2(-0.635,-2.825) 3(0.635,-2.825) 4(1.905,-2.825) 5(1.905,2.794) 6(0.635,2.794) 7(-0.635,2.794) 8(-1.905,2.794)
  Top Layer region: -2.35,2.925 -2.35,-1.575 2.35,-1.575 2.35,2.925
  silkscreen extent -3.55,-3.17 2.68,3.17, body extent -2.65,-2.92 2.7,3.23, height 1
SOT65P210X110-6L [mm] "SC-70-6, 6-Leads, Body 2.00x2.10mm, Pitch 0.65mm, IPC High Density"
  rect 0.4x0.65 smd mask+0.05: 1(-0.65,-1.025)
  rrect50% 0.4x0.65 smd mask+0.05: 2(0,-1.025) 3(0.65,-1.025) 4(0.65,1.025) 5(0,1.025) 6(-0.65,1.025)
  silkscreen extent -1.52,-1.15 1.1,0.3, body extent -1.05,-1.15 1.05,1.15, height 1
SOT65P220X110-3L [mm] "SOT-323-3 / SC-70-3, 3-Leads, Body 2.20x1.25mm, Pitch 0.65mm, IPC High Density"
  rect 0.47x0.85 smd mask+0.05: 1(-0.65,-0.93)
  rrect50% 0.47x0.85 smd mask+0.05: 2(0.65,-0.93) 3(0,0.93)
  silkscreen extent -1.2,-1.9 1.2,0.68, body extent -1,-1.1 1,1.1, height 1
SOT230P700X180-4L [mm] "SOT223, 4-Leads, Body 6.50x3.70mm (avg), Pitch 2.30mm, IPC High Density"
  rect 0.9x1.95 smd mask+0.05: 1(-2.3,-2.825)
  rrect50% 0.9x1.95 smd mask+0.05: 2(0,-2.825) 3(2.3,-2.825)
  rrect25% 3.25x1.95 smd mask+0.05: 4(0,2.825)
  silkscreen extent -3.43,-2.95 3.35,1.55, body extent -3.35,-3.5 3.35,3.5, height 1.8
ST-32-Trimm [mm] "SOT343, 3-Leads, Body 4.60x3.30mm, Pitch 2.00mm, IPC High Density"
  rect 1.2x1.45 smd mask+0.05: 1(-1.6,-1) 3(-1.6,1)
  rect 1.2x1.8 smd mask+0.05: 2(1.6,0)
  silkscreen extent -2.16,-2.54 1.6,2.3, body extent -1.75,-1.7 1.75,1.7, height 2
SW_JS202011SCQN [mm] "Slide Switch, Vertical, SMD, 6-Leads, Body 9.0x3.6mm"
  rect 1.2x2.5 smd mask+0.05: 1(-2.5,-2.75)
  rrect50% 1.2x2.5 smd mask+0.05: 2(0,-2.75) 3(2.5,-2.75) 4(-2.5,2.75) 5(0,2.75) 6(2.5,2.75)
  silkscreen extent -4.5,-4.85 4.5,1.8, body extent -4.5,-3.75 4.5,3.75, height 5.5
SWITCHCRAFT_RASM722X [mm] "SMD, 3-Leads, Body 14.5x9mm"
  rect 4.06x3.3 smd: 1(-4.57,0.545)
  rrect50% 6.35x3.81 smd: 2(4.57,-6.645)
  rrect50% 6.35x3.3 smd: 3(4.57,6.645)
  silkscreen extent -7.88,-4.34 11.3,4.59, body extent -5.84,-7.5 11.23,7.5, height 11.1
TE_147873-1 [mm] "PB 2 Pol"
  rect 2.8x2.2 smd paste+0 mask+0: 1(-2.4,0)
  rrect50% 2.8x2.2 smd paste+0 mask+0: 2(2.4,0)
  silkscreen extent -3.15,-1.9 3.15,1.9, body extent -3.9,-2 3.9,2, height 0.25
TP10R [mm] "Testpoint, round, d=1.0mm"
  round 1 smd paste-1 mask+0: 1(0,0)
  silkscreen extent -0.74,-0.74 0.74,0.74
TSOP65P280X100-8L [mm] "TSOP-8, 8-Leads, Body 2.90x1.63mm, Pitch 0.65mm, IPC High Density"
  rect 0.45x0.75 smd mask+0.05: 1(-0.975,-1.275)
  rrect50% 0.45x0.75 smd mask+0.05: 2(-0.325,-1.275) 3(0.325,-1.275) 4(0.975,-1.275) 5(0.975,1.275) 6(0.325,1.275) 7(-0.325,1.275) 8(-0.975,1.275)
  silkscreen extent -1.87,-1.4 1.45,0.5, body extent -1.45,-1.4 1.45,1.4, height 1
TSOP65P640X120-17T277X246L [mm] "TSOP-16, 16-Leads, Body 5.00x4.40mm, Pitch 0.65mm, Thermal Pad 2.77x2.46mm, IPC High Density"
  rect 0.4x1.2 smd: 1(-2.275,-2.85)
  rrect50% 0.4x1.2 smd: 2(-1.625,-2.85) 3(-0.975,-2.85) 4(-0.325,-2.85) 5(0.325,-2.85) 6(0.975,-2.85) 7(1.625,-2.85) 8(2.275,-2.85) 9(2.275,2.85) 10(1.625,2.85) 11(0.975,2.85) 12(0.325,2.85) 13(-0.325,2.85) 14(-0.975,2.85) 15(-1.625,2.85) 16(-2.275,2.85)
  rrect10% 2.77x2.46 smd: 17(0,0)
  silkscreen extent -3.15,-2.97 2.55,1.85, body extent -2.55,-3.2 2.55,3.2, height 1.2
WUERTH_693071010811 [mm] "Micro SD-Card connector"
  rrect50% 0.8x1.5 smd: 1(-4.05,3.825) 2(-2.95,3.425) 3(-1.85,3.825) 4(-0.75,4.025) 5(0.35,3.825) 6(1.45,4.025) 7(2.56,3.825) 8(3.66,3.825)
  rrect50% 1.8x1.4 smd: 11(-2.85,-6.475) 12(2.85,-6.475)
  rrect50% 1.4x1.9 smd: 13(4.45,6.675) 14(-8.7,7.675)
  silkscreen extent -9.1,-6.88 5,8.32, body extent -9.1,-6.87 4.9,8.33, height 1.83

## Part data
6_M1_STEP 6_STEP_2 7_DIR_2 7_M1_DIR 8_VCC_IO 8_VCC_IO_2 16_31_VS_2 23_AIN_IREF 23_AIN_IREF_2 36_TST_MODE 36_TST_MODE_2: library part CMP-00028-00011-11, "Test Pad 1.0 mm, SMD, d1.0", Mounting Technology=SMD, Size=d1.0, Type="Test Pad"
BAT1 BAT2 CAN_Bus: library part CMP-002-00172-16, "Header, 1x3Pin, Pitch 2.54mm, Male, Horizontal, THT", Manufacturer="Sullins Connector Solutions", Angle=Horizontal, Gender=Male, Insulation Height=2.5mm, Mating Length=8.08m, Mounting Technology=THT, Overall Contact Length=0mm, Pin Mapping=1x3, Pins=3, Pitch=2.54mm, Pitch Row=2.54mm, Termination Length=3.05mm
C1 C5 C7 C8 C9 C11 C13 C15 C17 C19 C20 C23 C25 C29 C32 C34 C36 C48 C49 C50 C51 C52 C57 C58 C60 C61 C202: library part CMP-001-00067-18, "Cap MLCC, 100nF, 50V, X7R, 10%, 0402", Case Code (Metric)=1005, Case/Package=0402, Dielectricum=X7R, Tolerance=10%, Voltage Rating=50V, Mounting Technology=SMD, Type=MLCC
C2 C10 C12 C18 C24 C37: library part CMP-001-00092-17, "Cap MLCC, 10uF, 50V, X5R, 10%, 1206", Case Code (Metric)=3216, Case/Package=1206, Dielectricum=X5R, Tolerance=10%, Voltage Rating=50V, Mounting Technology=SMD, Type=MLCC
C3 C27 C28: library part CMP-001-00097-16, "Cap MLCC, 47uF, 16V, X5R, 20%, 1210", Case Code (Metric)=3525, Case/Package=1210, Dielectricum=X5R, Tolerance=20%, Voltage Rating=16V, Mounting Technology=SMD, Type=MLCC
C4 C26 C31 C55: library part CMP-00016-9, "Cap MLCC, 4.7uF, 50V, X5R, 10%, 0805", Case Code (Metric)=2012, Case/Package=0805, Dielectricum=X5R, Tolerance=10%, Voltage Rating=50V, Mounting Technology=SMD, Type=MLCC
C6: library part CMP-00153-5, "Cap MLCC, 15pF, 50V, C0G, 5%, 0402", Case Code (Metric)=1005, Case/Package=0402, Dielectricum=C0G, Tolerance=5%, Voltage Rating=50V, Mounting Technology=SMD, Type=MLCC
C14 C16 C21 C22 C33 C53 C59 C62: library part CMP-00006-9, "Cap MLCC, 1uF, 50V, X5R, 10%, 0603", Case Code (Metric)=1608, Case/Package=0603, Dielectricum=X5R, Tolerance=10%, Voltage Rating=50V, Mounting Technology=SMD, Type=MLCC
C30 C35 C56: library part CMP-001-00062-18, "Cap MLCC, 22nF, 50V, X7R, 10%, 0402", Case Code (Metric)=1005, Case/Package=0402, Dielectricum=X7R, Tolerance=10%, Voltage Rating=50V, Mounting Technology=SMD, Type=MLCC
CAN: library part CMP-00196-7, "Bus Interface, CAN Transceiver, 3..3.6V, 1 Ch, SOIC-8, L5B3.98H1.75", Case/Package=SOIC-8, Max Supply Voltage=3.6V, Min Supply Voltage=3V, Bus Type="CAN Transceiver", Channels=1, Mounting Technology=SMD, Size=L5B3.98H1.75
"CAN RX" "CAN TX" "IMU SDA" "SD CS" "SD MISO" "SD MOSI": library part CMP-007-00026-12, "LED, Blue, 20mA, 2.8V, 0603", Case/Package=0603, Color=Blue, Forward Voltage=2.8V, Rated Current=20mA, Mounting Technology=SMD, Size=L1.6B0.8H0.8
CHARGE: library part CMP-002-00013-19, "Barrel Power Jack, 3 Pin, Male, 5A, 250V, Horizontal, SMD, L14.5B9H11", Manufacturer=Switchcraft, Max Current=5A, Max Voltage=250V, Angle=Horizontal, Connection=Pluggable, Gender=Male, Mounting Technology=SMD, Pin Mapping=2+1, Pins=3, Pitch=0mm, Size=L14.5B9H11, Type=Jack
CN7: library part CMP-002-00168-22, "Pinout for ST Nucleo 446RE, Connector CN7, bottom down connection, don't turn around, distance between CN7 and CN10 is 2400m (Pin 1 to Pin 1), SMD-38", Case/Package=SMD-38, Mounting Technology=SMD, Size=-
CN10: library part CMP-002-00167-21, "Pinout for ST Nucleo 446RE, Connector CN10, bottom down connection, don't turn around, distance between CN7 and CN10 is 2400m (Pin 1 to Pin 1), SMD-38", Case/Package=SMD-38, Mounting Technology=SMD, Size=-
D1: library part CMP-004-00103-1, "TVS Diode, bidirectional, 54V, 6.9A, 600W, SMB-2", Case/Package=SMB-2, Peak Current=6.9A, Peak Power=600W, Rated Voltage=54V, Connection=single, Direction=Unidirectional, Mounting Technology=SMD
D3 D5 D6 D7 D8 D9 D10 D11: library part CMP-004-00045-16, "Schottky Diode, 40V, 120mA, SOT323, 2 in series", Case/Package="SC-70 / SOT-323-3", Current=120mA, Voltage=40V, Connection="2 in series", Mounting Technology=SMD, Type=Schottky
"DRV ERR 1" "DRV ERR 2" "IND PLS 1" "IND PLS 2" "M. EN" "M. ERR": library part CMP-007-00025-12, "LED, Yellow, 20mA, 2.0V, 0603", Case/Package=0603, Color=Yellow, Forward Voltage=2V, Rated Current=20mA, Mounting Technology=SMD, Size=L1.6B0.8H0.8
EMPTY FULL HALF LOW: library part CMP-007-00002-10, "LED, Green, 20mA, 2.0V, 0603", Case/Package=0603, Color=Green, Forward Voltage=2V, Rated Current=20mA, Mounting Technology=SMD, Size=1.1mm, Wavelength=571nm
F1: library part CMP-00093-7, "Resettable Fuse, Ihold 500mA, Itrip 1A, 13.2V, 1210", Case/Package=1210, Voltage Rating=13.2V, Ihold=500mA, Itrip=1A, Mounting Technology=SMD
F2 F3 F4: library part CMP-00028-00005-13, "Fiducial, SMD, d1.0", Mounting Technology=SMD, Size=d1.0, Type=Fiducial
IMU: library part CMP-010-00035-1, "Gyroscope+Acceleration+Magnetometer, 9-Axis, 1.9..3.6 V, I2C & SPI, LGA-24", Case/Package=LGA-24, Max Supply Voltage=3.6V, Min Supply Voltage=1.9V, Interface="I2C, SPI", Mounting Technology=SMD, Resolution=16bit, Sample Rate=-, Sensor Type="Gyroscope, Acceleration, Magnetometer, 9-Axis"
J1 J2: library part CMP-009-00148-29, "Res, 0R, 1%, 0.063W, 0402", Case Code (Metric)=1005, Case/Package=0402, Power=63mW, Tolerance=1%, Voltage Rating=50V, Mounting Technology=SMD, Type=Fixed
J3: library part CMP-00360-4, "Header, 3x6Pin, Pitch 2.54mm, Male, Horizontal, THT", Manufacturer=Samtec, Angle=Horizontal, Gender=Male, Insulation Height=2.54mm, Mating Length=5.84mm, Mounting Technology=Board, Pin Mapping=3x6, Pins=18, Pitch=2.54mm, Pitch Row=2.54mm, Plating=Gold, Termination Length=2.29mm
J4 J5 J6 J7 J8 J9 J10 J11 J12 J13: library part CMP-00030-00013-3, "Solder Jumper, 0402, 3 Positions, SMD", Mounting Technology=SMD, Type="Solder Jumper"
J14: library part CMP-00368-4, "Header, 3x8Pin, Pitch 2.54mm, Male, Horizontal, THT", Manufacturer=Samtec, Angle=Horizontal, Gender=Male, Insulation Height=2.54mm, Mating Length=5.84mm, Mounting Technology=Board, Pin Mapping=3x6, Pins=18, Pitch=2.54mm, Pitch Row=2.54mm, Plating=Gold, Termination Length=2.29mm
L3: library part CMP-006-00040-5, "Coil, 5.6uH, 49mR, 6A, 20%, 6A, 2626", Case/Package=2626, Current=6A, Inductivity=5.6µH, Resistance DC=49m, Tolerance=20%, Mounting Technology=SMD
LED1 LED2: library part CMP-007-00024-12, "LED, Red, 20mA, 2.0V, 0603", Case/Package=0603, Color=Red, Forward Voltage=2V, Rated Current=20mA, Mounting Technology=SMD, Size=L1.6B0.8H0.8
M4 M5: library part CMP-002-00114-13, "Header, 1x4Pin, Pitch 2.54mm, Male, Vertical, THT", Manufacturer=FCI, Angle=Vertical, Gender=Male, Insulation Height=2.54mm, Mating Length=5.84mm, Mounting Technology=THT, Overall Contact Length=11.43mm, Pin Mapping=1x4, Pins=4, Pitch=2.54mm, Pitch Row=2.54mm, Termination Length=3.05mm
POT1 POT2: library part CMP-009-00192-14, "Trim, 20kR, 10%, 0.125W, SMD", Case/Package=SMD-3, Power=125mW, Tolerance=20%, Voltage Rating=200V, Mounting Technology=SMD, Size=L3.4B3.4H2, Type=Trimmer
R1 R8 R10 R15 R28 R41 R49 R51 R55 R57 R59 R62 RX: library part CMP-009-00149-32, "Res, 10kR, 1%, 0.1W, 0402", Case Code (Metric)=1005, Case/Package=0402, Power=100mW, Tolerance=1%, Voltage Rating=50V, Mounting Technology=SMD, Type=Fixed
R2 R4 R7 R16 R17 R20 R22 R23 R24 R25 R26 R27 R29 R30 R31 R32 R33 R34 R67 R68: library part CMP-009-00009-32, "Res, 1kR, 1%, 0.1W, 0402", Case Code (Metric)=1005, Case/Package=0402, Power=100mW, Tolerance=1%, Voltage Rating=50V, Mounting Technology=SMD, Type=Fixed
R3: library part CMP-009-00132-31, "Res, 330R, 1%, 0.063W, 0402", Case Code (Metric)=1005, Case/Package=0402, Power=63mW, Tolerance=1%, Voltage Rating=50V, Mounting Technology=SMD, Type=Fixed
R5: library part CMP-009-00152-29, "Res, 10R, 1%, 0.063W, 0402", Case Code (Metric)=1005, Case/Package=0402, Power=63mW, Tolerance=1%, Voltage Rating=50V, Mounting Technology=SMD, Type=Fixed
R6 R19 R21 R61 R65 R66: library part CMP-009-00137-31, "Res, 47kR, 1%, 0.063W, 0402", Case Code (Metric)=1005, Case/Package=0402, Power=63mW, Tolerance=1%, Voltage Rating=50V, Mounting Technology=SMD, Type=Fixed
R9: library part CMP-009-00028-32, "Res, 33kR, 1%, 0.063W, 0402", Case Code (Metric)=1005, Case/Package=0402, Power=63mW, Tolerance=1%, Voltage Rating=50V, Mounting Technology=SMD, Type=Fixed
R11: library part CMP-009-00136-30, "Res, 5.6kR, 1%, 0.063W, 0402", Case Code (Metric)=1005, Case/Package=0402, Power=63mW, Tolerance=1%, Voltage Rating=50V, Mounting Technology=SMD, Type=Fixed
R12: library part CMP-009-00085-21, "Res, 3.3kR, 1%, 0.063W, 0402", Case Code (Metric)=1005, Case/Package=0402, Power=63mW, Tolerance=1%, Voltage Rating=50V, Mounting Technology=SMD, Type=Fixed
R13 R64: library part CMP-009-00128-30, "Res, 2.2R, 1%, 0.063W, 0402", Case Code (Metric)=1005, Case/Package=0402, Power=63mW, Tolerance=1%, Voltage Rating=50V, Mounting Technology=SMD, Type=Fixed
R14 R18 R69 R70: library part CMP-009-00457-1, "Res, 120mR, 1%, 1W, 0612", Case Code (Metric)=1632, Case/Package=0612, Power=1W, Temperature Coefficient=100ppm, Tolerance=1%, Voltage Rating=200V, Mounting Technology=SMD, Type=Fixed
R36 R37: library part CMP-009-00451-1, "Res, 21kR, 1%, 0.063W, 0402", Case Code (Metric)=1005, Case/Package=0402, Power=63mW, Temperature Coefficient=100ppm, Tolerance=1%, Voltage Rating=50V, Mounting Technology=SMD, Type=Fixed
R38 R39 R60: library part CMP-009-00022-32, "Res, 100kR, 1%, 0.1W, 0402", Case Code (Metric)=1005, Case/Package=0402, Power=100mW, Tolerance=1%, Voltage Rating=50V, Mounting Technology=SMD, Type=Fixed
R40 R42: library part CMP-009-00030-32, "Res, 4.7kR, 1%, 0.1W, 0402", Case Code (Metric)=1005, Case/Package=0402, Power=100mW, Tolerance=1%, Voltage Rating=50V, Mounting Technology=SMD, Type=Fixed
R63: library part CMP-009-00180-22, "Res, 6.8kR, 1%, 0.063W, 0402", Case Code (Metric)=1005, Case/Package=0402, Power=63mW, Tolerance=1%, Voltage Rating=50V, Mounting Technology=SMD, Type=Fixed
Reset User: library part CMP-011-00025-1, "Push Button, Vertical, SPST-NO, 24V, 50mA, L6B3.5H5", Current Rating=50mA, Voltage Rating=24V, Actuation=Push, Angle=Vertical, Contact Form=SPST-NO, Contact Material=Silver, Illuminated=No, Mounting Technology=SMD, Size=L6B3.5H5, Type=Button
S4 S5: library part CMP-011-00022-7, "Slide Switch, Vertical, DPDT, 30V, 100mA, L9B3H3.5", Current Rating=100mA, Voltage Rating=30V, Actuation=Slide, Angle=Vertical, Contact Form=DPDT, Contact Material="Copper Alloy", Illuminated=No, Mounting Technology=SMD, Size=L9B3H3.5, Type=Switch
SD: library part CMP-002-00218-6, "SD-Card Micro Connector, 8 Position, Push In, Push Out, SMD", Manufacturer=Würth, Max Voltage=100V, Angle=Horizontal, Connection=Pluggable, Family Name=WR-CRD, Mounting Technology=SMD, Pins=8, Size=L15.2B14H2.1, Type=SD-Card
T1 T2: library part CMP-013-00069-13, "MOSFET N-Enh, 30V, 60A, 100Ap, 2.1mR, 27.8W, SO-8", Case/Package=PowerPAK-SO-8, Current=60A, Current peak=100A, Power=27.8W, Resistance=2.1m, Voltage=30V, Mounting Technology=SMD, Technology=N-enh, Type=MOSFET
U1: library part CMP-014-00025-8, "OP 4 Ch, 2.7..5.5V, 1MHz, 1V/us, R2R: Out, SOIC-14", Case/Package=SOIC-14, Input Bias Current=11nA, Input Offset Voltage=1.7mV, Max Supply Voltage=5V, Min Supply Voltage=2.7V, Quiescent Current / Ch="102uA @ 5V", Channels=4, CMRR=63dB, Function=OP, GBW=1MHz, Input Noise (1/sqr(Hz))="39nV @ 1kHz", Mounting Technology=SMD, Rail-to-Rail=Out, Slew Rate (V/us)=1V/us
U2: library part CMP-013-00047-14, "High-Side Switch, 1 Ch, 12..45V, 1.4A, SOT-223-4", Case/Package=SOT-223-4, Max Current=1.4A, Max Logic Voltage=12V, Min Logic Voltage=45V, Channels=1, Function="High-Side Switch", Mounting Technology=SMD
U3 U5: library part CMP-00358-2, "Half Bridge, 4 Ch, 4..18V, Power 4..18V, 1A, 4Ap, TSOP-16, L5.1B6.2H1.2", Case/Package=TSOP-16, Max Current=1A, Max Logic Voltage=18V, Min Logic Voltage=4V, Peak Current=4A, Channels=4, Function="Half Bridge", Max Power Voltage=18V, Min Power Voltage=18V, Mounting Technology=SMD, Size=L5.1B6.2H1.2
U4 U6: library part CMP-00362-1, "INV, 2 Ch, 1 In/Ch, 0.8..5.5V, SC70-6, L2B2.2H1", Case/Package=SC70-6, Max Supply Voltage=3.6V, Min Supply Voltage=800mV, Channels=2, Function=INV, Inputs per Channel=1, Mounting Technology=SMD, Size=L2B2.2H1
U8: library part CMP-00363-1, "Buck Converter, 0.8..15.2V, 2A, 4.5..16Vin, SOT23-8", Case/Package=VSSOP, Frequency=500kHz, Max In Voltage=16V, Max Out Current=2A, Max Out Voltage=15.2V, Min In Voltage=4.5V, Min Out Voltage=800mV, Mounting Technology=SMD